# Altium PCB ITEMS PCB Rev A.PcbDoc (part 1 of 2)
Units mm, origin at the board's own origin, x right, y up, seen from the top; angles counter-clockwise.
Board outline 90 x 90 mm, 4 copper layers (Top Layer 1, Inner 1, Ground, Bottom Layer 1), stack 0.567 mm thick; 78 components, 58 nets, 244 pads, 50 vias.
Unrouted connection lines stored in the file: 137.
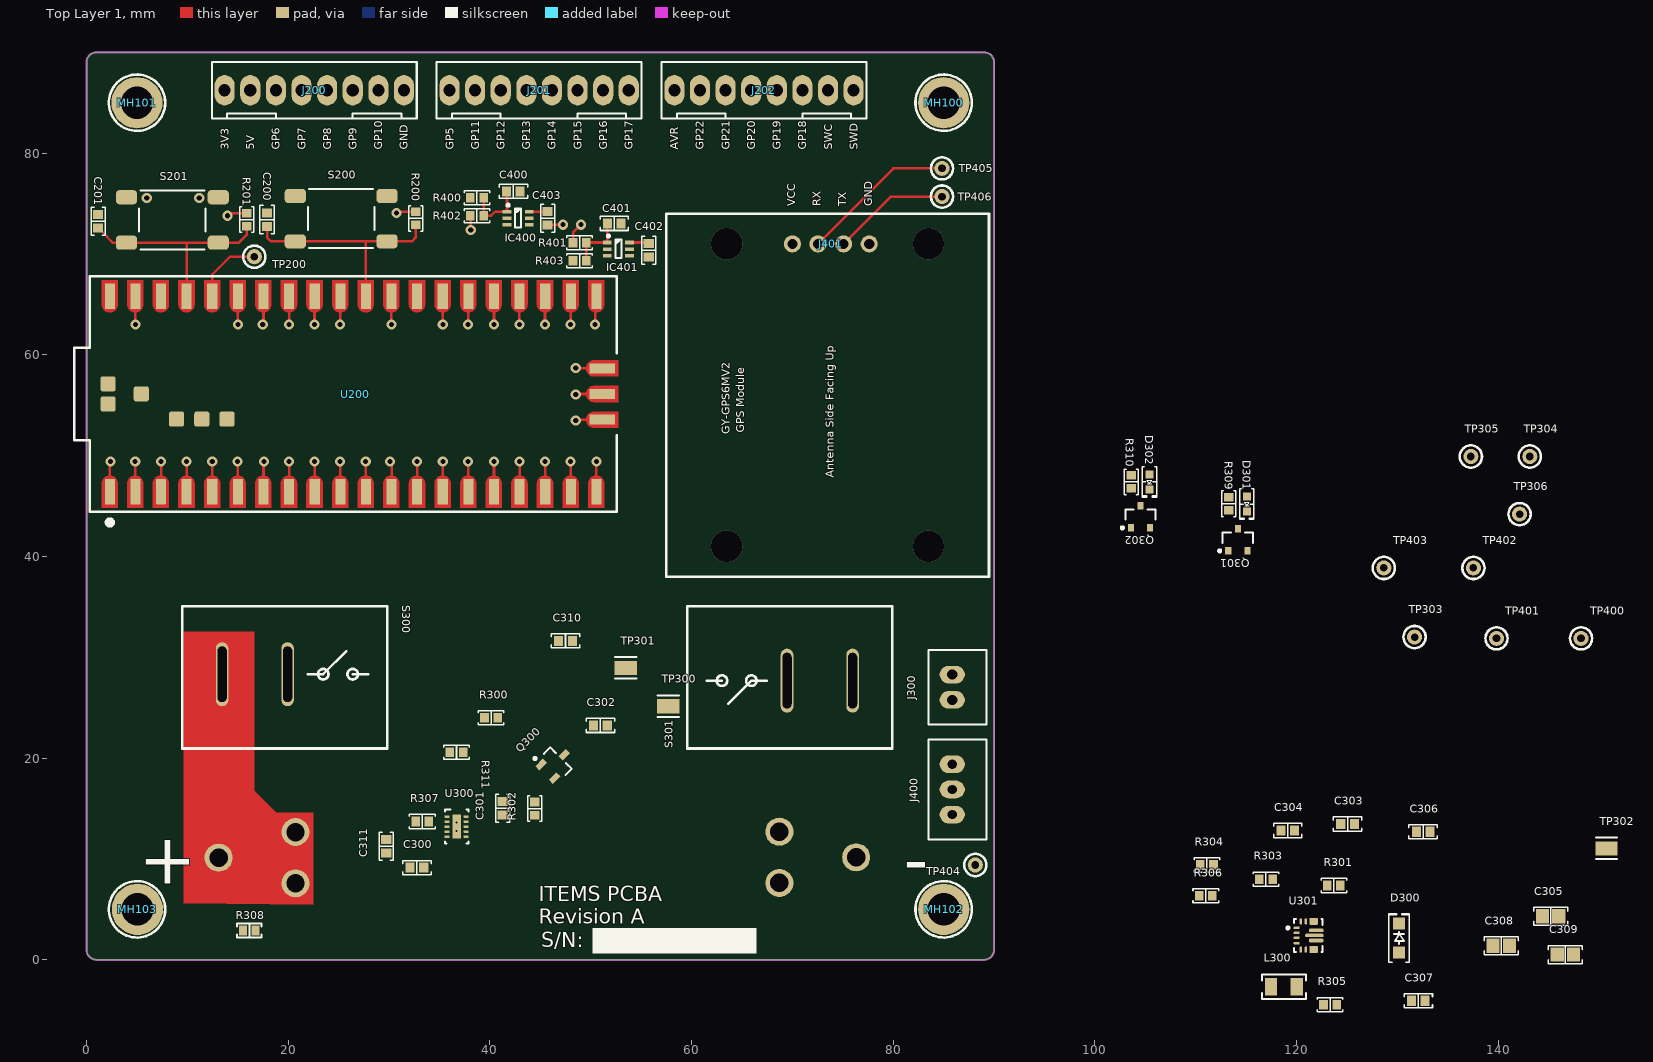
[diagram p0: Top Layer 1 view]
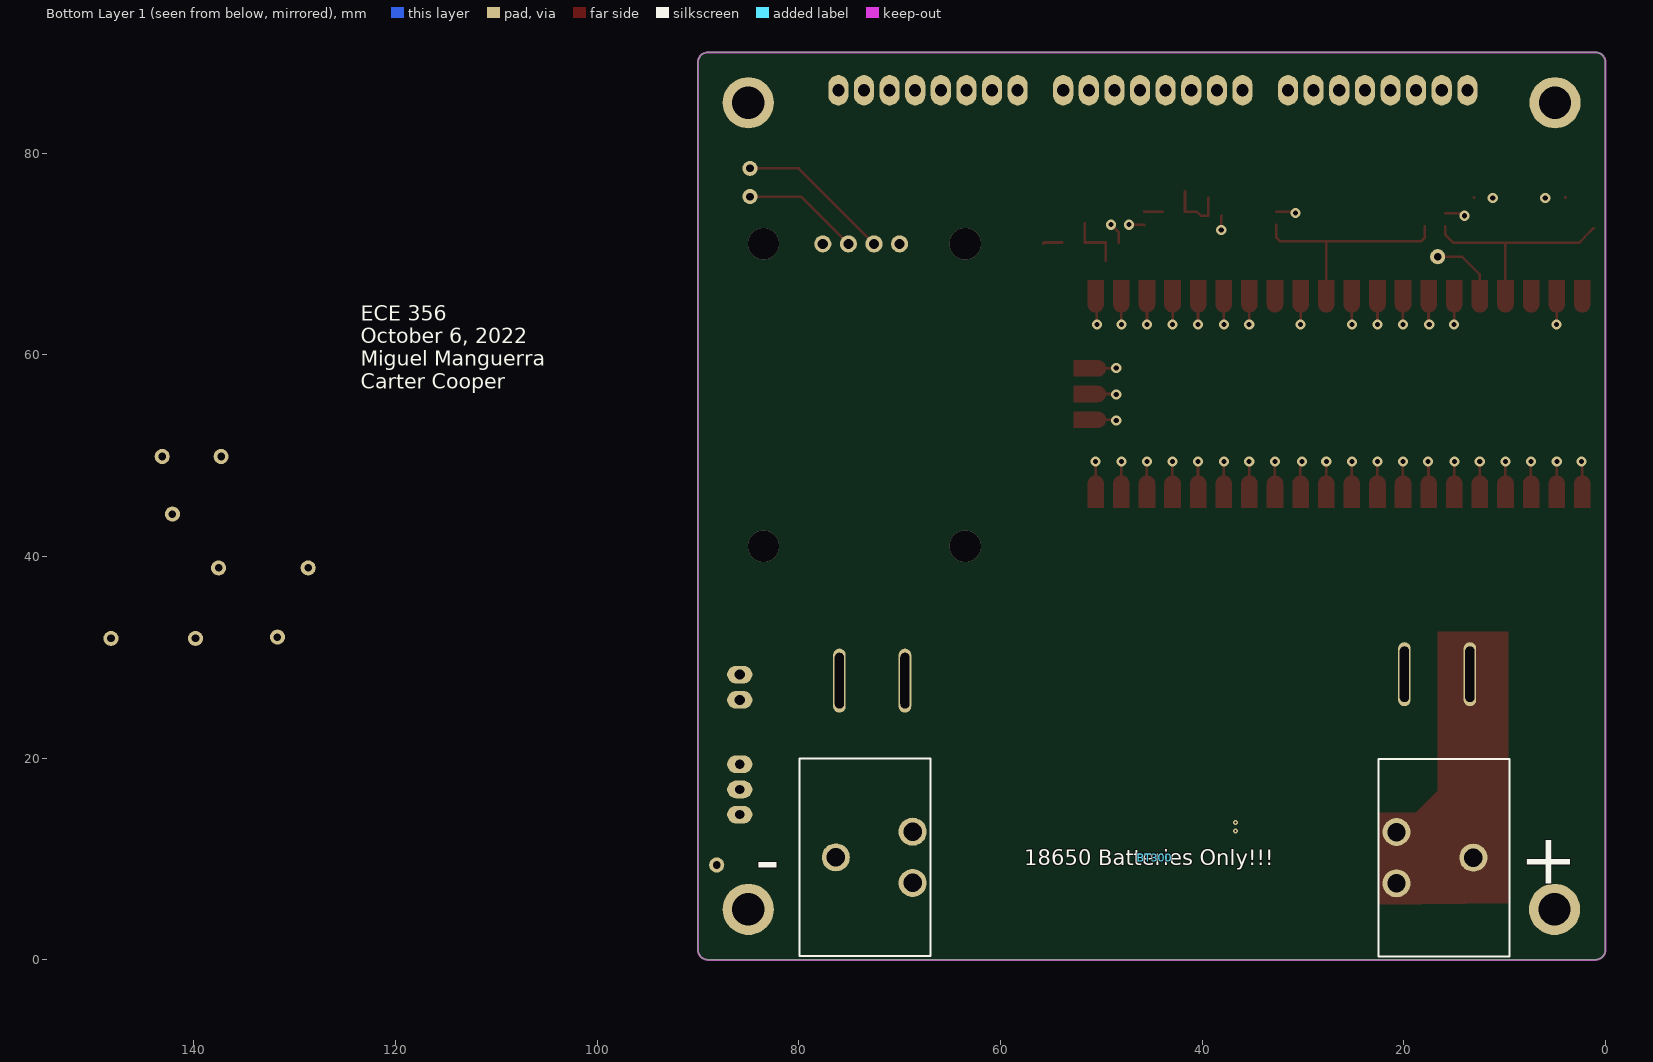
[diagram p1: Bottom Layer 1 view, seen from below]
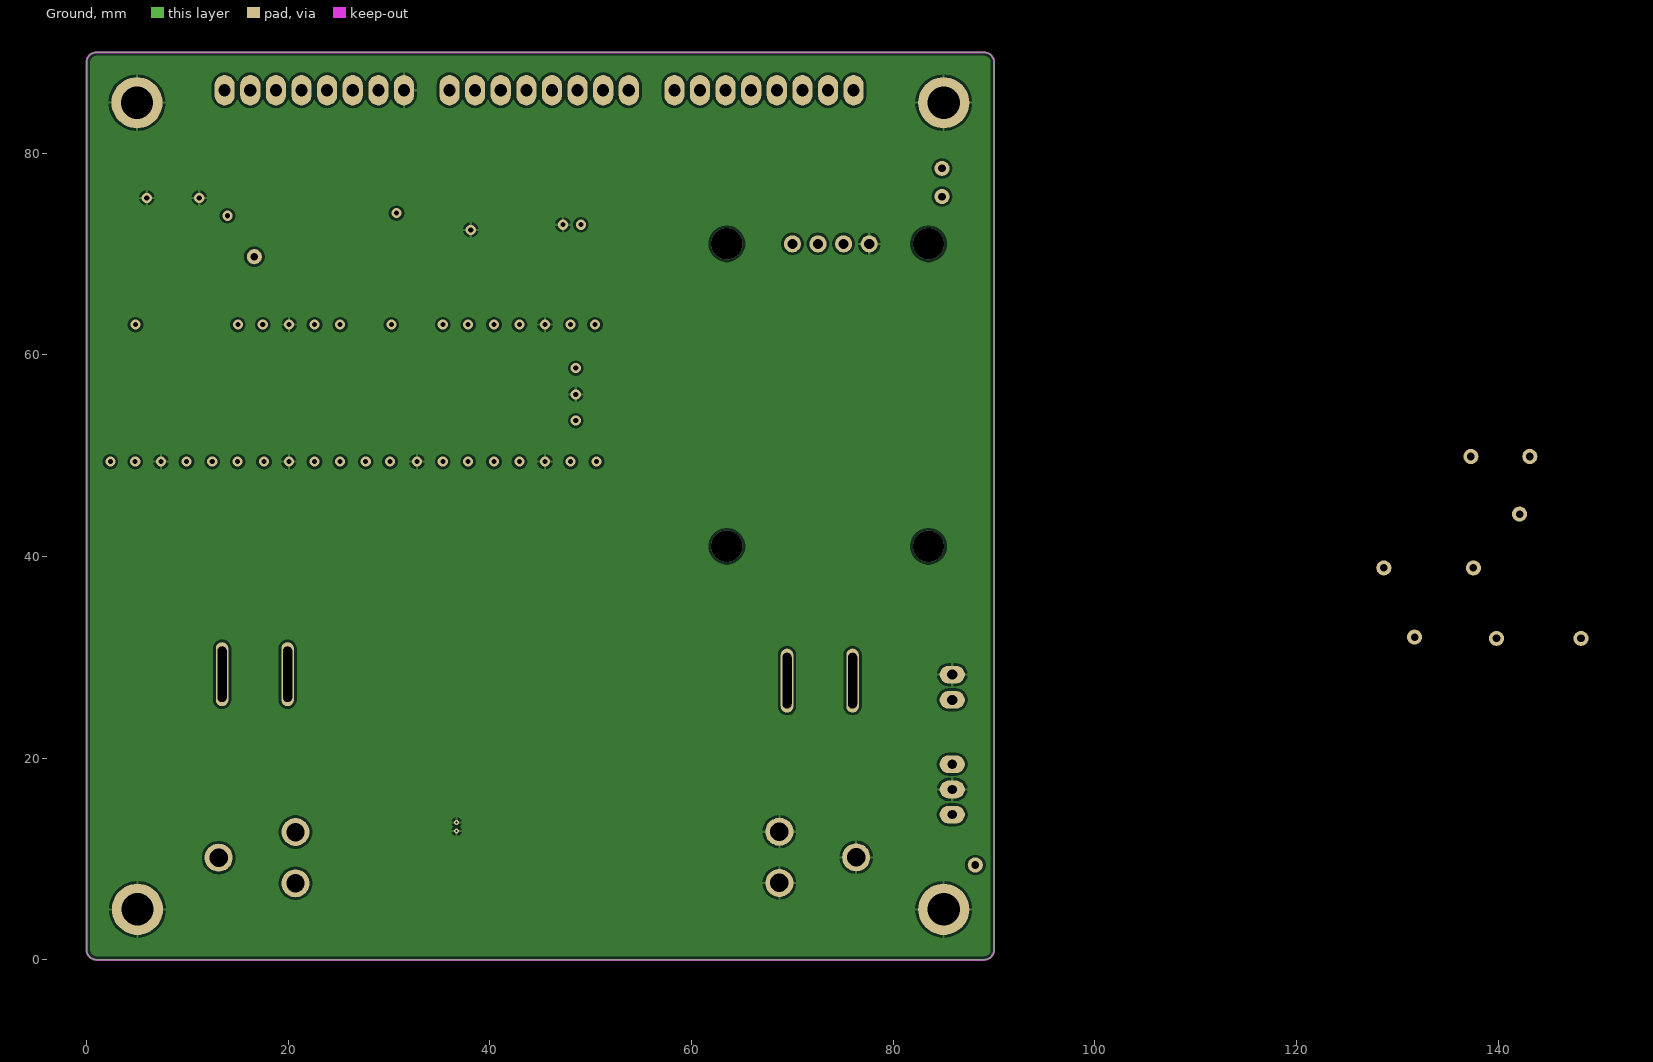
[diagram p2: Ground]

## Layer stack, top to bottom
Top Solder: solder mask 0.0102, Solder Resist, Dk 3.5
Top Layer 1: signal copper 0.035
Dielectric 2: prepreg 0.0711, PP-006, Dk 4.1
Inner 1: signal copper 0.0175
Dielectric 1: dielectric 0.32, FR-4, Dk 4.8
Ground: signal copper 0.0175
Dielectric 3: prepreg 0.0711, PP-006, Dk 4.1
Bottom Layer 1: signal copper 0.035
Bottom Solder: solder mask 0.0102, Solder Resist, Dk 3.5

## Board outline
0,1 0,89 cw(c1,89) 1,90 89,90 cw(c89,89) 90,89 90,1 cw(c89,1) 89,0 1,0 cw(c1,1)

## Design rules (kind name [scope] priority, off if disabled: settings)
Clearance [All] p1: gap=0.254 ignorepadtopadclearanceinfootprint=TRUE except(0: Arc-Hole Track-Hole SMDPad-Hole THPad-Hole Via-Hole Fill-Hole Poly-Hole Region-Hole Text-Hole)
PolygonConnect [All] p1: thpad.connectstyle=Relief thpad.reliefconductorwidth=0.254 thpad.reliefentries=4 thpad.polygonreliefangle="90 Angle" thpad.airgapwidth=0.254 smdpad.connectstyle=Direct smdpad.reliefconductorwidth=0.254 smdpad.reliefentries=4 smdpad.polygonreliefangle="90 Angle" smdpad.airgapwidth=0.254 via.connectstyle=Direct via.reliefconductorwidth=0.254 via.reliefentries=4 via.polygonreliefangle="90 Angle" via.airgapwidth=0.254
RoutingVias [All] p1: holewidth=0.5 width=1 viastyle="Through Hole" minholewidth=0.25 minwidth=0.5 maxholewidth=0.75 maxwidth=1.5
SolderMaskExpansion [All] p1: expansion=0.102 istentingtop=FALSE
Width [All] p1: maxlimit=0.254 minlimit=0.254 preferedwidth=0.254
30 further rules are at their usual default settings.

## Classes and differential pairs
component class Master: MH100 MH101 MH102 MH103
component class Designator: BT300 C300 C301 C302 C303 C304 C305 C306 C307 C308 C309 C310 C311 D300 D301 D302 J300 L300 Q300 Q301 Q302 R300 R301 R302 R303 R304 R305 R306 R307 R308 R309 R310 R311 S300 S301 TP300 TP301 TP302 TP303 TP304 TP305 TP306 U300 U301

## Components (designator, comment, footprint, x,y, rotation, side; value= is the part's Value field where it differs from the comment)
BT300 "54" FP-54-MFG 16,10.126 r270 bottom
C200 "0.1 µF" "CAP 0603_1608" 17.899,73.406 r270 top
C201 "0.1 µF" "CAP 0603_1608" 1.143,73.239 r270 top
C300 "0.1 µF" "CAP 0603_1608" 32.766,9.144 r0 top
C301 "0.1 µF" "CAP 0603_1608" 41.275,15.026 r90 top
C302 "10 µF" "CAP 0603_1608" 50.967,23.241 r0 top
C303 "10 µF" "CAP 0603_1608" 125.055,13.462 r0 top
C304 "10 µF" "CAP 0603_1608" 119.126,12.827 r0 top
C305 "22 µF" "CAP 0805_2012" 145.199,4.318 r0 top
C306 "0.1 µF" "CAP 0603_1608" 132.548,12.7 r0 top
C307 "10 µF" "CAP 0603_1608" 132.08,-4.064 r0 top
C308 "22 µF" "CAP 0805_2012" 140.297,1.397 r0 top
C309 "22 µF" "CAP 0805_2012" 146.647,0.508 r0 top
C310 "0.1 µF" "CAP 0603_1608" 47.498,31.623 r0 top
C311 "0.1 µF" "CAP 0603_1608" 29.718,11.263 r90 top
C400 "0.022 µF" "CAP 0603_1608" 42.331,76.2 r180 top
C401 "0.022 µF" "CAP 0603_1608" 52.324,73.025 r180 top
C402 "0.1 µF" "CAP 0603_1608" 55.753,70.358 r90 top
C403 "0.1 µF" "CAP 0603_1608" 45.72,73.533 r90 top
D300 "RBR2MM40CTFTR" SOD123F 130.175,2.159 r90 top
D301 "Green" "LED 0603_1608 GREEN" 115.062,45.2 r270 top
D302 "Green" "LED 0603_1608 GREEN" 105.41,47.395 r270 top
IC400 "LMV601MGX/NOPB" "TI SC70-6 DCK" 42.799,73.533 r0 top
IC401 "LMV601MGX/NOPB" "TI SC70-6 DCK" 52.748,70.485 r0 top
J200 "0022272081" "MOLEX KK 0022272081" 22.586,86.233 r0 top
J201 "0022272081" "MOLEX KK 0022272081" 44.885,86.233 r0 top
J202 "0022272081" "MOLEX KK 0022272081" 67.183,86.233 r0 top
J300 "B2B-XH-A(LF)(SN)" "JST XH B2B-XH-A" 85.852,27.031 r90 top
J400 "B3B-XH-A(LF)(SN)" "JST XH B3B-XH-A" 85.852,16.891 r90 top
J401 "GY-GPS6MV2" "GY-GPS6MV2 -Footprint-1" 63.5,56 r0 top locked
L300 "1.5µH" "IND 1008_2520" 118.74,-2.667 r0 top
MH100 "Exposed Mounting Hole M3" "Mounting Hole M3-Footprint-1"#1 85,85 r0 top locked
MH101 "Exposed Mounting Hole M3" "Mounting Hole M3-Footprint-1"#1 5,85 r0 top locked
MH102 "Exposed Mounting Hole M3" "Mounting Hole M3-Footprint-1"#1 85,5 r0 top locked
MH103 "Exposed Mounting Hole M3" "Mounting Hole M3-Footprint-1"#2 5,5 r0 top locked
Q300 "BSS314PE" INF-PG-SOT23_N 46.558,19.507 r45 top
Q301 "BSS126" INF-PG-SOT23_L 114.173,41.656 r90 top
Q302 "BSS126" INF-PG-SOT23_L 104.521,43.942 r90 top
R200 "10 kOhms" "RES 0603_1608" 32.639,73.533 r90 top
R201 "10 kOhms" "RES 0603_1608" 15.875,73.406 r90 top
R300 "0 Ohms" "RES 0603_1608" 40.117,24.003 r0 top
R301 "0 Ohms" "RES 0603_1608" 123.698,7.366 r0 top
R302 "10 kOhms" "RES 0603_1608" 44.45,15.001 r90 top
R303 "10 kOhms" "RES 0603_1608" 116.967,8.001 r0 top
R304 "300 kOhms" "RES 0603_1608" 111.11,9.398 r0 top
R305 "10 kOhms" "RES 0603_1608" 123.317,-4.445 r0 top
R306 "51 kOhms" "RES 0603_1608" 110.998,6.35 r0 top
R307 "3.3 kOhms" "RES 0603_1608" 33.289,13.716 r0 top
R308 "47k" "NTC 0603_1608" 16.139,2.921 r0 top
R309 "1 kOhms" "RES 0603_1608" 113.258,45.227 r270 top
R310 "1 kOhms" "RES 0603_1608" 103.606,47.395 r270 top
R311 "0 Ohms" "RES 0603_1608" 36.688,20.574 r0 top
R400 "10 kOhms" "RES 0603_1608" 38.72,75.565 r180 top
R401 "17.4 kOhms" "RES 0603_1608" 48.895,71.12 r180 top
R402 "33 kOhms" "RES 0603_1608" 38.72,73.787 r0 top
R403 "33 kOhms" "RES 0603_1608" 48.895,69.342 r0 top
S200 "1977223-9" "TE FSM4JSMA" 25.251,73.497 r90 top
S201 "1977223-9" "TE FSM4JSMA" 8.509,73.37 r90 top
S300 "Rocker Switch" "Rocker Switch-Footprint-1" 13.439,28.321 r0 top
S301 "Rocker Switch" "Rocker Switch-Footprint-1" 75.969,27.686 r180 top
TP200 "1.5mm Test Point" "1mm Test Point-Footprint-1" 16.637,69.723 r0 top
TP300 "S2751-46R" FP-S2751-46R-MFG 57.692,25.146 r0 top
TP301 "S2751-46R" FP-S2751-46R-MFG 53.467,28.956 r0 top
TP302 "S2751-46R" FP-S2751-46R-MFG 150.749,11.049 r0 top
TP303 "1.5mm Test Point" "1mm Test Point-Footprint-1" 131.699,32.004 r0 top
TP304 "1.5mm Test Point" "1mm Test Point-Footprint-1" 143.129,49.911 r0 top
TP305 "1.5mm Test Point" "1mm Test Point-Footprint-1" 137.287,49.911 r0 top
TP306 "1.5mm Test Point" "1mm Test Point-Footprint-1" 142.113,44.196 r0 top
TP400 "1.5mm Test Point" "1mm Test Point-Footprint-1" 148.209,31.877 r90 top
TP401 "1.5mm Test Point" "1mm Test Point-Footprint-1" 139.827,31.877 r90 top
TP402 "1.5mm Test Point" "1mm Test Point-Footprint-1" 137.541,38.862 r90 top
TP403 "1.5mm Test Point" "1mm Test Point-Footprint-1" 128.651,38.862 r90 top
TP404 "1.5mm Test Point" "1mm Test Point-Footprint-1" 88.138,9.402 r90 top
TP405 "1.5mm Test Point" "1mm Test Point-Footprint-1" 84.836,78.486 r90 top
TP406 "1.5mm Test Point" "1mm Test Point-Footprint-1" 84.836,75.692 r90 top
U200 "SC0918" "New footprint 1" 26.722,56.108 r90 top
U300 "BQ25050DQCR" DQC0010A 36.703,13.208 r0 top
U301 "TPS63070RNMR" FP-RNM0015A-MFG 121.158,2.413 r0 top

## Footprints (in the part's own frame and the unit in brackets; to place one, negate y for a bottom-side part, rotate by r counter-clockwise, add the part's x,y. Pads: shape width x height; smd on the part's side, far side on the other; paste and mask are expansions set on the pad)
"1mm Test Point-Footprint-1" [mm]
  round 1.5 hole 0.75: 1(0,0)
  silkscreen extent -1.1,-1.1 1.1,1.1
"CAP 0603_1608" [mm] "Chip Capacitor, 2-Leads, Body 1.60x0.80mm, IPC Medium Density"
  rect 0.9x1 smd: 1(-0.675,0) 2(0.675,0)
  silkscreen extent -1.4,-0.7 1.4,0.7, body extent -0.8,-0.41 0.8,0.41, height 0.82
"CAP 0805_2012" [mm] "Chip Capacitor, 2-Leads, Body 2.00x1.20mm, IPC Medium Density"
  rect 1.3x1.4 smd: 1(-0.8,0) 2(0.8,0)
  silkscreen extent -1.7,-0.9 1.7,0.9, body extent -1,-0.64 1,0.64, height 1.26
DQC0010A [mm] "SON, 10-Leads, Body 2x3mm, Pitch 0.5mm, Thermal Pad 2.4x0.84mm"
  rrect40% 0.5x0.25 smd: 1(-0.95,1) 2(-0.95,0.5) 3(-0.95,0) 4(-0.95,-0.5) 5(-0.95,-1) 6(0.95,-1) 7(0.95,-0.5) 8(0.95,0) 9(0.95,0.5) 10(0.95,1)
  rrect12% 0.84x2.4 smd paste-0.42 mask+0.102: 11(0,0)
  silkscreen extent -1.18,-1.67 1.18,1.67, body extent -1.05,-1.55 1.05,1.55, height 0.81
FP-54-MFG [mm]
  round 2.78 hole 1.83 paste-1000 mask+0: 1(-2.54,-4.72) 1(0,2.9) 1(2.54,-4.72) 2(-2.574,-52.707) 2(-0.034,-60.327) 2(2.506,-52.707)
  silkscreen extent -9.83,-63.93 9.8,6.5, body extent -9.11,-63.9 9.05,6.48, height 19.16
FP-RNM0015A-MFG [mm]
  rrect40% 0.6x0.25 smd paste+0 mask-1000: 1(-1.15,0.75) 2(-1.15,0.25) 3(-1.15,-0.25) 4(-1.15,-0.75)
  rrect40% 0.25x0.6 smd paste+0 mask-1000: 5(-0.725,-1.4) 6(-0.225,-1.4) 14(-0.225,1.4) 15(-0.725,1.4)
  rrect29% 0.85x0.7 smd paste-1000 mask-1000: 7-8(0.525,-1.4) 12-13(0.525,1.4)
  rrect57% 1.45x0.35 smd paste-1000 mask-1000: 9(0.775,-0.5) 11(0.775,0.5)
  rrect57% 1.8x0.35 smd paste-1000 mask-1000: 10(0.6,0)
  silkscreen extent -2.15,-1.65 1.4,1.65, body extent -1.55,-1.85 1.6,1.85, height 0.25
FP-S2751-46R-MFG [mm]
  rect 2.2x1.4 smd paste+0 mask+0: 1(0,0)
  silkscreen extent -1.05,-1.07 1.05,1.07, body extent -1.2,-0.8 1.2,0.8, height 0.25
"GY-GPS6MV2 -Footprint-1" [mm]
  round 1.7 hole 1: 1(6.5,15) 2(9.04,15) 3(11.58,15) 4(14.12,15)
  silkscreen extent -6,-18 26,18, body extent 4.96,13.84 15.62,16.34, height 5
"IND 1008_2520" [mm] "Chip Inductance, 2-leads, Body 2.5x2.1mm, IPC Medium Density"
  rect 1.2x1.75 smd: 1(-1.275,0) 2(1.275,0)
  silkscreen extent -2.18,-1.22 2.2,1.22, body extent -1.3,-1.05 1.3,1.05, height 1
INF-PG-SOT23_L [mm] "SOT23, 3-Leads, Body 2.9x1.3mm, Pitch 0.95mm, IPC High Density"
  rect 0.75x0.6 smd: 1(-1.1,0.95) 2(-1.1,-0.95) 3(1.1,0)
  silkscreen extent -1.22,-1.5 0.7,1.92, body extent -0.7,-1.5 0.7,1.5, height 1.1
INF-PG-SOT23_N [mm] "SOT23, 3-Leads, Body 2.9x1.3mm, Pitch 0.95mm, IPC Medium Density"
  rect 1.05x0.6 smd: 1(-1.15,0.95) 2(-1.15,-0.95) 3(1.15,0)
  silkscreen extent -1.27,-1.5 0.7,1.92, body extent -0.7,-1.5 0.7,1.5, height 1.1
"JST XH B2B-XH-A" [mm]
  oval 1.75x2.5 hole 1: 1(-1.25,0) 2(1.25,0)
  silkscreen extent -3.7,-3.38 3.7,2.38, body extent -3.7,-3.38 3.7,2.38, height 7
"JST XH B3B-XH-A" [mm]
  oval 1.75x2.5 hole 0.9: 1(-2.5,0) 2(0,0) 3(2.5,0)
  silkscreen extent -4.95,-3.38 4.95,2.38, body extent -4.95,-3.38 4.95,2.38, height 7
"LED 0603_1608 GREEN" [mm] "Chip Diode, 2-Leads, Body 1.60x0.80mm, IPC Medium Density"
  rect 0.8x0.8 smd: 1(-0.75,0) 2(0.75,0)
  silkscreen extent -1.52,-0.7 1.52,0.7, body extent -0.8,-0.4 0.8,0.4, height 0.53
"MOLEX KK 0022272081" [mm]
  oval 2x3 hole 1.2: 1(-8.89,0) 2(-6.35,0) 3(-3.81,0) 4(-1.27,0) 5(1.27,0) 6(3.81,0) 7(6.35,0) 8(8.89,0)
  silkscreen extent -10.16,-2.79 10.16,2.79, body extent -10.16,-2.9 10.16,2.9, height 11.7
"Mounting Hole M3-Footprint-1"#1 [mm]
  round 5.08 hole 3.2: 0(0,0)
  silkscreen extent -2.79,-2.79 2.79,2.79
"Mounting Hole M3-Footprint-1"#2 [mm]
  round 5.08 hole 3.2: 0(0.047,0)
  silkscreen extent -2.79,-2.79 2.79,2.79
"New footprint 1" [mm]
  rect 2.5x1 smd mask+0.102: 1(-9.69,24.415) 2(-9.69,21.875) 4(-9.69,16.795) 5(-9.69,14.255) 6(-9.69,11.715) 7(-9.69,9.175) 8(-9.69,6.635) 9(-9.69,4.095) 10(-9.69,1.555) 11(-9.69,-0.985) 12(-9.69,-3.525) 13(-9.69,-6.065) 14(-9.69,-8.605) 15(-9.69,-11.145) 16(-9.69,-13.685) 17(-9.69,-16.225) 18(-9.69,-18.765) 19(-9.69,-21.305) 20(-9.69,-23.845)
  rrect25% 2.5x1 smd mask+0.102: 3(-9.69,19.335)
  rect 2.5x1 smd: 21(9.69,-23.845) 22(9.69,-21.305) 23(9.69,-18.765) 24(9.69,-16.225) 25(9.69,-13.685) 26(9.69,-11.145) 27(9.69,-8.605) 28(9.69,-6.065) 29(9.69,-3.525) 30(9.69,-0.985) 31(9.69,1.555) 32(9.69,4.095) 33(9.69,6.635) 34(9.69,9.175) 35(9.69,11.715) 36(9.69,14.255) 37(9.69,16.795) 38(9.69,19.335) 39(9.69,21.875) 40(9.69,24.415)
  rect 1x2.5 smd: 41(-2.54,-24.415) 42(0,-24.415) 43(2.54,-24.415)
  rrect30% 1.5x1.5 smd: 44(0.01,21.292) 45(1.01,24.592) 46(-0.99,24.592) 47(-2.49,17.792) 48(-2.49,15.292) 49(-2.49,12.792)
  Top Layer 1 region: -1.74,-25.999 -3.34,-25.999 -3.34,-23.599 -3.34,-23.599 -3.261,-23.252 -3.039,-22.974 -2.718,-22.819 -2.362,-22.819 -2.041,-22.974 -1.819,-23.252 -1.74,-23.599 -1.74,-23.599
  Top Layer 1 region: 0.8,-25.999 -0.8,-25.999 -0.8,-23.599 -0.8,-23.599 -0.721,-23.252 -0.499,-22.974 -0.178,-22.819 0.178,-22.819 0.499,-22.974 0.721,-23.252 0.8,-23.599 0.8,-23.599
  Top Layer 1 region: 3.34,-25.999 1.74,-25.999 1.74,-23.599 1.74,-23.599 1.819,-23.252 2.041,-22.974 2.362,-22.819 2.718,-22.819 3.039,-22.974 3.261,-23.252 3.34,-23.599 3.34,-23.599
  Top Layer 1 region: -11.292,-24.629 -11.292,-23.029 -8.892,-23.029 -8.892,-23.029 -8.545,-23.108 -8.267,-23.33 -8.112,-23.651 -8.112,-24.007 -8.267,-24.328 -8.545,-24.55 -8.892,-24.629 -8.892,-24.629
  Top Layer 1 region: -11.292,-22.089 -11.292,-20.489 -8.892,-20.489 -8.892,-20.489 -8.545,-20.568 -8.267,-20.79 -8.112,-21.111 -8.112,-21.467 -8.267,-21.788 -8.545,-22.01 -8.892,-22.089 -8.892,-22.089
  Top Layer 1 region: -11.292,-19.549 -11.292,-17.949 -8.892,-17.949 -8.892,-17.949 -8.545,-18.028 -8.267,-18.25 -8.112,-18.571 -8.112,-18.927 -8.267,-19.248 -8.545,-19.47 -8.892,-19.549 -8.892,-19.549
  Top Layer 1 region: -11.292,-17.009 -11.292,-15.409 -8.892,-15.409 -8.892,-15.409 -8.545,-15.488 -8.267,-15.71 -8.112,-16.031 -8.112,-16.387 -8.267,-16.708 -8.545,-16.93 -8.892,-17.009 -8.892,-17.009
  Top Layer 1 region: -11.292,-14.469 -11.292,-12.869 -8.892,-12.869 -8.892,-12.869 -8.545,-12.948 -8.267,-13.17 -8.112,-13.491 -8.112,-13.847 -8.267,-14.168 -8.545,-14.39 -8.892,-14.469 -8.892,-14.469
  Top Layer 1 region: -11.292,-11.929 -11.292,-10.329 -8.892,-10.329 -8.892,-10.329 -8.545,-10.408 -8.267,-10.63 -8.112,-10.951 -8.112,-11.307 -8.267,-11.628 -8.545,-11.85 -8.892,-11.929 -8.892,-11.929
  Top Layer 1 region: -11.292,-9.389 -11.292,-7.789 -8.892,-7.789 -8.892,-7.789 -8.545,-7.868 -8.267,-8.09 -8.112,-8.411 -8.112,-8.767 -8.267,-9.088 -8.545,-9.31 -8.892,-9.389 -8.892,-9.389
  Top Layer 1 region: -11.292,-6.849 -11.292,-5.249 -8.892,-5.249 -8.892,-5.249 -8.545,-5.328 -8.267,-5.55 -8.112,-5.871 -8.112,-6.227 -8.267,-6.548 -8.545,-6.77 -8.892,-6.849 -8.892,-6.849
  Top Layer 1 region: -11.292,-4.309 -11.292,-2.709 -8.892,-2.709 -8.892,-2.709 -8.545,-2.788 -8.267,-3.01 -8.112,-3.331 -8.112,-3.687 -8.267,-4.008 -8.545,-4.23 -8.892,-4.309 -8.892,-4.309
  Top Layer 1 region: -11.292,-1.769 -11.292,-0.169 -8.892,-0.169 -8.892,-0.169 -8.545,-0.248 -8.267,-0.47 -8.112,-0.791 -8.112,-1.147 -8.267,-1.468 -8.545,-1.69 -8.892,-1.769 -8.892,-1.769
  Top Layer 1 region: -11.292,0.771 -11.292,2.371 -8.892,2.371 -8.892,2.371 -8.545,2.292 -8.267,2.07 -8.112,1.749 -8.112,1.393 -8.267,1.072 -8.545,0.85 -8.892,0.771 -8.892,0.771
  Top Layer 1 region: -11.292,3.311 -11.292,4.911 -8.892,4.911 -8.892,4.911 -8.545,4.832 -8.267,4.61 -8.112,4.289 -8.112,3.933 -8.267,3.612 -8.545,3.39 -8.892,3.311 -8.892,3.311
  Top Layer 1 region: -11.292,5.851 -11.292,7.451 -8.892,7.451 -8.892,7.451 -8.545,7.372 -8.267,7.15 -8.112,6.829 -8.112,6.473 -8.267,6.152 -8.545,5.93 -8.892,5.851 -8.892,5.851
  Top Layer 1 region: -11.292,8.391 -11.292,9.991 -8.892,9.991 -8.892,9.991 -8.545,9.912 -8.267,9.69 -8.112,9.369 -8.112,9.013 -8.267,8.692 -8.545,8.47 -8.892,8.391 -8.892,8.391
  Top Layer 1 region: -11.292,10.931 -11.292,12.531 -8.892,12.531 -8.892,12.531 -8.545,12.452 -8.267,12.23 -8.112,11.909 -8.112,11.553 -8.267,11.232 -8.545,11.01 -8.892,10.931 -8.892,10.931
  Top Layer 1 region: -11.292,13.471 -11.292,15.071 -8.892,15.071 -8.892,15.071 -8.545,14.992 -8.267,14.77 -8.112,14.449 -8.112,14.093 -8.267,13.772 -8.545,13.55 -8.892,13.471 -8.892,13.471
  Top Layer 1 region: -11.292,16.011 -11.292,17.611 -8.892,17.611 -8.892,17.611 -8.545,17.532 -8.267,17.31 -8.112,16.989 -8.112,16.633 -8.267,16.312 -8.545,16.09 -8.892,16.011 -8.892,16.011
  Top Layer 1 region: -11.292,18.551 -11.292,20.151 -8.892,20.151 -8.892,20.151 -8.545,20.072 -8.267,19.85 -8.112,19.529 -8.112,19.173 -8.267,18.852 -8.545,18.63 -8.892,18.551 -8.892,18.551
  Top Layer 1 region: -11.292,21.091 -11.292,22.691 -8.892,22.691 -8.892,22.691 -8.545,22.612 -8.267,22.39 -8.112,22.069 -8.112,21.713 -8.267,21.392 -8.545,21.17 -8.892,21.091 -8.892,21.091
  Top Layer 1 region: -11.292,23.631 -11.292,25.231 -8.892,25.231 -8.892,25.231 -8.545,25.152 -8.267,24.93 -8.112,24.609 -8.112,24.253 -8.267,23.932 -8.545,23.71 -8.892,23.631 -8.892,23.631
  Top Layer 1 region: 11.292,23.631 11.292,25.231 8.892,25.231 8.892,25.231 8.545,25.152 8.267,24.93 8.112,24.609 8.112,24.253 8.267,23.932 8.545,23.71 8.892,23.631 8.892,23.631
  Top Layer 1 region: 11.292,21.091 11.292,22.691 8.892,22.691 8.892,22.691 8.545,22.612 8.267,22.39 8.112,22.069 8.112,21.713 8.267,21.392 8.545,21.17 8.892,21.091 8.892,21.091
  Top Layer 1 region: 11.292,18.551 11.292,20.151 8.892,20.151 8.892,20.151 8.545,20.072 8.267,19.85 8.112,19.529 8.112,19.173 8.267,18.852 8.545,18.63 8.892,18.551 8.892,18.551
  Top Layer 1 region: 11.292,16.011 11.292,17.611 8.892,17.611 8.892,17.611 8.545,17.532 8.267,17.31 8.112,16.989 8.112,16.633 8.267,16.312 8.545,16.09 8.892,16.011 8.892,16.011
  Top Layer 1 region: 11.292,13.471 11.292,15.071 8.892,15.071 8.892,15.071 8.545,14.992 8.267,14.77 8.112,14.449 8.112,14.093 8.267,13.772 8.545,13.55 8.892,13.471 8.892,13.471
  Top Layer 1 region: 11.292,10.931 11.292,12.531 8.892,12.531 8.892,12.531 8.545,12.452 8.267,12.23 8.112,11.909 8.112,11.553 8.267,11.232 8.545,11.01 8.892,10.931 8.892,10.931
  Top Layer 1 region: 11.292,8.391 11.292,9.991 8.892,9.991 8.892,9.991 8.545,9.912 8.267,9.69 8.112,9.369 8.112,9.013 8.267,8.692 8.545,8.47 8.892,8.391 8.892,8.391
  Top Layer 1 region: 11.292,5.851 11.292,7.451 8.892,7.451 8.892,7.451 8.545,7.372 8.267,7.15 8.112,6.829 8.112,6.473 8.267,6.152 8.545,5.93 8.892,5.851 8.892,5.851
  Top Layer 1 region: 11.292,3.311 11.292,4.911 8.892,4.911 8.892,4.911 8.545,4.832 8.267,4.61 8.112,4.289 8.112,3.933 8.267,3.612 8.545,3.39 8.892,3.311 8.892,3.311
  Top Layer 1 region: 11.292,0.771 11.292,2.371 8.892,2.371 8.892,2.371 8.545,2.292 8.267,2.07 8.112,1.749 8.112,1.393 8.267,1.072 8.545,0.85 8.892,0.771 8.892,0.771
  Top Layer 1 region: 11.292,-1.769 11.292,-0.169 8.892,-0.169 8.892,-0.169 8.545,-0.248 8.267,-0.47 8.112,-0.791 8.112,-1.147 8.267,-1.468 8.545,-1.69 8.892,-1.769 8.892,-1.769
  Top Layer 1 region: 11.292,-4.309 11.292,-2.709 8.892,-2.709 8.892,-2.709 8.545,-2.788 8.267,-3.01 8.112,-3.331 8.112,-3.687 8.267,-4.008 8.545,-4.23 8.892,-4.309 8.892,-4.309
  Top Layer 1 region: 11.292,-6.849 11.292,-5.249 8.892,-5.249 8.892,-5.249 8.545,-5.328 8.267,-5.55 8.112,-5.871 8.112,-6.227 8.267,-6.548 8.545,-6.77 8.892,-6.849 8.892,-6.849
  Top Layer 1 region: 11.292,-9.389 11.292,-7.789 8.892,-7.789 8.892,-7.789 8.545,-7.868 8.267,-8.09 8.112,-8.411 8.112,-8.767 8.267,-9.088 8.545,-9.31 8.892,-9.389 8.892,-9.389
  Top Layer 1 region: 11.292,-11.929 11.292,-10.329 8.892,-10.329 8.892,-10.329 8.545,-10.408 8.267,-10.63 8.112,-10.951 8.112,-11.307 8.267,-11.628 8.545,-11.85 8.892,-11.929 8.892,-11.929
  Top Layer 1 region: 11.292,-14.469 11.292,-12.869 8.892,-12.869 8.892,-12.869 8.545,-12.948 8.267,-13.17 8.112,-13.491 8.112,-13.847 8.267,-14.168 8.545,-14.39 8.892,-14.469 8.892,-14.469
  Top Layer 1 region: 11.292,-17.009 11.292,-15.409 8.892,-15.409 8.892,-15.409 8.545,-15.488 8.267,-15.71 8.112,-16.031 8.112,-16.387 8.267,-16.708 8.545,-16.93 8.892,-17.009 8.892,-17.009
  Top Layer 1 region: 11.292,-19.549 11.292,-17.949 8.892,-17.949 8.892,-17.949 8.545,-18.028 8.267,-18.25 8.112,-18.571 8.112,-18.927 8.267,-19.248 8.545,-19.47 8.892,-19.549 8.892,-19.549
  Top Layer 1 region: 11.292,-22.089 11.292,-20.489 8.892,-20.489 8.892,-20.489 8.545,-20.568 8.267,-20.79 8.112,-21.111 8.112,-21.467 8.267,-21.788 8.545,-22.01 8.892,-22.089 8.892,-22.089
  Top Layer 1 region: 11.292,-24.629 11.292,-23.029 8.892,-23.029 8.892,-23.029 8.545,-23.108 8.267,-23.33 8.112,-23.651 8.112,-24.007 8.267,-24.328 8.545,-24.55 8.892,-24.629 8.892,-24.629
  silkscreen extent -12.99,-25.88 11.68,27.94, body extent -10.49,-25.21 10.51,27.22, height 3.69
"NTC 0603_1608" [mm] "NTC Thermistor, 2-Leads, Body 1.60x0.80mm, IPC Medium Density"
  rect 0.8x1 smd: 1(-0.625,0) 2(0.625,0)
  silkscreen extent -1.2,-0.7 1.2,0.7, body extent -0.8,-0.41 0.8,0.41, height 0.82
"RES 0603_1608" [mm] "Chip Resistor, 2-Leads, Body 1.60x0.80mm, IPC Medium Density"
  rect 0.85x0.95 smd: 1(-0.65,0) 2(0.65,0)
  silkscreen extent -1.27,-0.7 1.27,0.7, body extent -0.8,-0.4 0.8,0.4, height 0.45
"Rocker Switch-Footprint-1" [mm]
  oval 1.25x6.35 hole 0.889 slot 5.5 at 90 deg: 1(0,0) 2(6.5,0)
  silkscreen extent -3.94,-7.37 16.38,6.73, body extent -4.28,-7.75 16.72,7.05, height 17.31
SOD123F [mm] "SODFL, 2-Leads, Body 1.60x3.50mm, IPC Medium Density"
  rect 1.2x1.2 smd: 1(-1.43,0) 2(1.43,0)
  silkscreen extent -2.41,-1.02 2.41,1.02, body extent -1.75,-0.8 1.75,0.8, height 1.1
"TE FSM4JSMA" [mm]
  rrect50% 1.4x2.1 smd: 1(2.25,4.55) 2(2.25,-4.55) 3(-2.25,4.55) 4(-2.25,-4.55)
  silkscreen extent -2.92,-3.3 2.92,3.3, body extent -3,-5 3,5, height 5.08
"TI SC70-6 DCK" [mm] "SC70, 6-Leads, Body 2.00x2.10mm, Pitch 0.65mm, IPC Medium Density"
  rect 0.85x0.35 smd: 1(-1.1,0.65) 2(-1.1,0) 3(-1.1,-0.65) 4(1.1,-0.65) 5(1.1,0) 6(1.1,0.65)
  silkscreen extent -1.12,-0.9 0.3,1.42, body extent -1.06,-1 1.06,1, height 1.1

## Part data
BT300: library part CMP-00051-1, "Cylindrical Battery Contacts, Clips, Holders & Springs 16-19mm PC BATTERY CLIP", Lead Free="Lead Free"
C200 C201 C402 C403: library part C0603X104M3RAC7867, "CAP CER 0.1UF 25V X7R 0603", Device Package="0603 (1608 Metric)", manufacturer=KEMET, Operating Temperature="-55°C ~ 125°C", Supplier Part Number 1=399-13148-1-ND, Temperature Coefficient=X7R, Tolerance=±20%, Voltage - Rated=25V, Applications="Boardflex Sensitive", Capacitance="0.1 µF", componentlink1description=Datasheet, componentlink1url=https://api.kemet.com/component-edge/download/datasheet/C0603X104M3RACTU.pdf, componentlink2description="DigiKey Link", componentlink2url=https://www.digikey.com/en/products/detail/kemet/C0603X104M3RAC7867/2202613, Features="Soft Termination", lastupdated="2022-03-07 3:18:24 PM", Lifecycle Status=Active, Minimum Order=1, Mounting Type="Surface Mount, MLCC", Package / Case="0603 (1608 Metric)", packaging=TapeAndReel, Part Number=C0603X104M3RAC7867, Part Status=Active, partid=2484, price=0.07, series="SMD Comm X7R Flex", Size / Dimension="0.063\" L x 0.031\" W (1.60mm x 0.80mm)", Supplier 1=DigiKey, Thickness (Max)="0.034\" (0.87mm)"
C300 C301 C306 C310 C311: library part C0603C104K5RAC7411, "CAP CER 0.1UF 50V X7R 0603", Device Package="0603 (1608 Metric)", manufacturer=KEMET, Operating Temperature="-55°C ~ 125°C", Supplier Part Number 1=399-7374-2-ND, Temperature Coefficient=X7R, Tolerance=±10%, Voltage - Rated=50V, Applications="Bypass, Decoupling", Capacitance="0.1 µF", componentlink1description=Datasheet, componentlink1url=https://api.kemet.com/component-edge/download/datasheet/C0603C104K5RAC7411.pdf, componentlink2description="DigiKey Link", componentlink2url=https://www.digikey.com/en/products/detail/kemet/C0603C104K5RAC7411/3317013, lastupdated="2022-09-19 1:01:20 PM", Lifecycle Status=Active, Minimum Order=15000, Mounting Type="Surface Mount, MLCC", Package / Case="0603 (1608 Metric)", packaging=TapeAndReel, Part Number=C0603C104K5RAC7411, Part Status=Active, partid=2233, price=0.01, series="SMD Comm X7R", Size / Dimension="0.063\" L x 0.031\" W (1.60mm x 0.80mm)", Supplier 1=DigiKey, Thickness (Max)="0.035\" (0.90mm)"
C302 C303 C304 C307: library part GRM188R61E106MA73J, "CAP CER 10UF 25V X5R 0603", Device Package="0603 (1608 Metric)", manufacturer="Murata Electronics", Operating Temperature="-55°C ~ 85°C", Supplier Part Number 1=490-12737-1-ND, Temperature Coefficient=X5R, Tolerance=±20%, Voltage - Rated=25V, Applications="General Purpose", Capacitance="10 µF", componentlink1description=Datasheet, componentlink1url=https://search.murata.co.jp/Ceramy/image/img/A01X/G101/ENG/GRM188R61E106MA73-01.pdf, componentlink2description="DigiKey Link", componentlink2url=https://www.digikey.com/en/products/detail/murata-electronics/GRM188R61E106MA73J/4905347, lastupdated="2022-09-19 1:00:57 PM", Lifecycle Status=Active, Minimum Order=1, Mounting Type="Surface Mount, MLCC", Package / Case="0603 (1608 Metric)", packaging=TapeAndReel, Part Number=GRM188R61E106MA73J, Part Status=Active, partid=10710, price=0.05, series=GRM, Size / Dimension="0.063\" L x 0.031\" W (1.60mm x 0.80mm)", Supplier 1=DigiKey, Thickness (Max)="0.039\" (1.00mm)"
C305 C308 C309: library part CL21A226MOQNNNE, "CAP CER 22UF 16V X5R 0805", Device Package="0805 (2012 Metric)", manufacturer="Samsung Electro-Mechanics", Operating Temperature="-55°C ~ 85°C", Supplier Part Number 1=1276-2909-1-ND, Temperature Coefficient=X5R, Tolerance=±20%, Voltage - Rated=16V, Applications="General Purpose", Capacitance="22 µF", componentlink1description=Datasheet, componentlink1url=http://www.samsungsem.com/kr/support/product-search/mlcc/CL21A226MOQNNNE.jsp, componentlink2description="DigiKey Link", componentlink2url=https://www.digikey.com/en/products/detail/samsung-electro-mechanics/CL21A226MOQNNNE/3888567, lastupdated="2022-09-19 1:04:25 PM", Lifecycle Status=Active, Minimum Order=1, Mounting Type="Surface Mount, MLCC", Package / Case="0805 (2012 Metric)", packaging=TapeAndReel, Part Number=CL21A226MOQNNNE, Part Status=Active, partid=3052, price=0.05, series=CL, Size / Dimension="0.079\" L x 0.049\" W (2.00mm x 1.25mm)", Supplier 1=DigiKey, Thickness (Max)="0.055\" (1.40mm)"
C400 C401: library part CC0603KRX7R7BB223, "CAP CER 0.022UF 16V X7R 0603", Device Package="0603 (1608 Metric)", manufacturer=Yageo, Operating Temperature="-55°C ~ 125°C", Supplier Part Number 1=311-1800-1-ND, Temperature Coefficient=X7R, Tolerance=±10%, Voltage - Rated=16V, Applications="General Purpose", Capacitance="0.022 µF", componentlink1description=Datasheet, componentlink1url=https://www.yageo.com/upload/media/product/productsearch/datasheet/mlcc/UPY-GPHC_X7R_6.3V-to-50V_18.pdf, componentlink2description="DigiKey Link", componentlink2url=https://www.digikey.com/en/products/detail/yageo/CC0603KRX7R7BB223/5195208, lastupdated="2022-09-19 1:01:04 PM", Lifecycle Status=Active, Minimum Order=1, Mounting Type="Surface Mount, MLCC", Package / Case="0603 (1608 Metric)", packaging=TapeAndReel, Part Number=CC0603KRX7R7BB223, Part Status=Active, partid=7845, price=0.01, series=CC, Size / Dimension="0.063\" L x 0.031\" W (1.60mm x 0.80mm)", Supplier 1=DigiKey, Thickness (Max)="0.035\" (0.90mm)"
D300: "DIODE (RECTIFIER FRD) 40V-VR 2A-", Current - Average Rectified (Io)=2A, Current - Reverse Leakage @ Vr="100 µA @ 40 V", manufacturer="Rohm Semiconductor", Operating Temperature - Junction="150°C (Max)", Package / Case=SOD-123F, Supplier Device Package=PMDU, Supplier Part Number 1=RBR2MM40CTFCT-ND, Voltage - DC Reverse (Vr) (Max)="40 V", Voltage - Forward (Vf) (Max) @ If="520 mV @ 2 A", componentlink1description=Datasheet, componentlink1url=https://www.rohm.com/datasheet/RBR2MM40CTF/rbr2mm40ctftr-e, componentlink2description="DigiKey Link", componentlink2url=https://www.digikey.com/en/products/detail/rohm-semiconductor/RBR2MM40CTFTR/9748140, Diode Type=Schottky, lastupdated="2022-09-19 1:46:35 PM", Lifecycle Status=Active, Minimum Order=1, Mounting Type="Surface Mount", packaging=TapeAndReel, Part Number=RBR2MM40CTFTR, Part Status=Active, partid=2367, price=0.12, series="Automotive, AEC-Q101", Speed="Fast Recovery =< 500ns, > 200mA (Io)", Supplier 1=DigiKey
D301 D302: library part XZVGT53W-6, "LED GREEN CLEAR 2SMD", Current - Test=20mA, Device Package="0603 (1608 Metric)", Lens Color=Colorless, manufacturer=SunLED, Millicandela Rating=49mcd, Supplier Device Package=2-SMD, Supplier Part Number 1=1497-1243-1-ND, Voltage - Forward (Vf) (Typ)=2.1V, Color=Green, componentlink1description=Datasheet, componentlink1url=https://www.sunledusa.com/products/spec/XZVGT53W-6.pdf, componentlink2description="DigiKey Link", componentlink2url=https://www.digikey.com/en/products/detail/sunled/XZVGT53W-6/4902128, Configuration=Standard, Height (Max)=0.28mm, lastupdated="2022-09-13 7:29:38 AM", Lens Size="1.20mm x 0.80mm", Lens Style="Rectangle with Flat Top", Lens Transparency=Clear, Lifecycle Status=Active, Minimum Order=1, Mounting Type="Surface Mount", Package / Case="0603 (1608 Metric)", packaging=TapeAndReel, Part Number=XZVGT53W-6, Part Status=Active, partid=581, price=0.05, series=-, Size / Dimension="1.60mm L x 0.80mm W", Supplier 1=DigiKey, Viewing Angle=120°, Wavelength - Dominant=570nm, Wavelength - Peak=574nm
IC400 IC401: "IC OPAMP GP 1 CIRCUIT SC70-6", Current - Input Bias=0.02pA, Current - Output / Channel=113mA, Current - Supply=107µA, Device Package="6-TSSOP, SC-88, SOT-363", manufacturer="Texas Instruments", Operating Temperature="-40°C ~ 125°C", Supplier Device Package=SC-70-6, Supplier Part Number 1=296-46438-1-ND, Voltage - Input Offset=250µV, Voltage - Supply, Single/Dual (±)="2.7V ~ 5.5V", Amplifier Type="General Purpose", componentlink1description=Datasheet, componentlink1url=http://www.ti.com/general/docs/suppproductinfo.tsp?distId=10&gotoUrl=http%3A%2F%2Fwww.ti.com%2Flit%2Fgpn%2Flmv601, componentlink2description="DigiKey Link", componentlink2url=http://digikey.com/product-detail/en/texas-instruments/LMV601MGX-NOPB/296-46438-1-ND/7033611, Gain Bandwidth Product=1MHz, lastupdated="2020-01-09 2:17:00 AM", Lifecycle Status=Active, Minimum Order=1, Mounting Type="Surface Mount", Number of Circuits=1, Output Type=Rail-to-Rail, Package / Case="6-TSSOP, SC-88, SOT-363", packaging=ReReel, Part Number=LMV601MGX/NOPB, Part Status=Active, partid=25, price=0.00, series=-, Slew Rate=1V/µs, Supplier 1=DigiKey
J200 J201 J202: "CONN HEADER VERT 8POS 2.54MM", Insulation Color=Natural, manufacturer=Molex, Material Flammability Rating="UL94 V-0", Supplier Part Number 1=WM4117-ND, componentlink1description=Datasheet, componentlink1url=https://www.molex.com/pdm_docs/sd/022272081_sd.pdf, componentlink2description="DigiKey Link", componentlink2url=http://digikey.com/product-detail/en/molex/0022272081/WM4117-ND/1130583, Connector Type=Header, Contact Finish - Mating=Tin, Contact Finish - Post=Tin, Contact Finish Thickness - Mating="100.0µin (2.54µm)", Contact Length - Mating="0.295\" (7.49mm)", Contact Length - Post="0.140\" (3.56mm)", Contact Material=Brass, Contact Shape=Square, Contact Type="Male Pin", Fastening Type="Friction Lock", Insulation Height="0.461\" (11.70mm)", Insulation Material="Polyamide (PA), Nylon", lastupdated="2020-01-12 11:52:41 PM", Lifecycle Status=Active, Minimum Order=1, Mounting Type="Through Hole", Number of Positions=8, Number of Positions Loaded=All, Number of Rows=1, Overall Contact Length="0.560\" (14.22mm)", packaging=Bulk, Part Number=0022272081, Part Status=Active, partid=82, Pitch - Mating="0.100\" (2.54mm)", price=0.60, series="KK 6410", Shrouding="Shrouded - 1 Wall", Style="Board to Cable/Wire", Supplier 1=DigiKey, Termination=Solder
J300: "CONN HEADER VERT 2POS 2.5MM", Current Rating (Amps)=3A, Insulation Color=Natural, manufacturer="JST Sales America Inc.", Material Flammability Rating="UL94 V-0", Operating Temperature="-25°C ~ 85°C", Supplier Part Number 1=455-2247-ND, Voltage Rating=250V, componentlink1description=Datasheet, componentlink1url=http://www.jst-mfg.com/product/pdf/eng/eXH.pdf, componentlink2description="DigiKey Link", componentlink2url=http://digikey.com/product-detail/en/jst-sales-america-inc/B2B-XH-A-LF-SN/455-2247-ND/1651045, Connector Type=Header, Contact Finish - Mating=Tin, Contact Finish - Post=Tin, Contact Length - Post="0.134\" (3.40mm)", Contact Material=Brass, Contact Shape=Square, Contact Type="Male Pin", Fastening Type="Detent Lock", Insulation Height="0.276\" (7.00mm)", Insulation Material="Polyamide (PA66), Nylon 6/6", lastupdated="2020-01-12 11:46:08 PM", Lifecycle Status=Active, Minimum Order=1, Mounting Type="Through Hole", Number of Positions=2, Number of Positions Loaded=All, Number of Rows=1, packaging=Bulk, Part Number=B2B-XH-A(LF)(SN), Part Status=Active, partid=67, Pitch - Mating="0.098\" (2.50mm)", price=0.15, series=XH, Shrouding="Shrouded - 4 Wall", Style="Board to Cable/Wire", Supplier 1=DigiKey, Termination="Press-Fit, Solder"
J400: "CONN HEADER VERT 3POS 2.5MM", Current Rating (Amps)=3A, Insulation Color=Natural, manufacturer="JST Sales America Inc.", Material Flammability Rating="UL94 V-0", Operating Temperature="-25°C ~ 85°C", Supplier Part Number 1=455-2248-ND, Voltage Rating=250V, componentlink1description=Datasheet, componentlink1url=http://www.jst-mfg.com/product/pdf/eng/eXH.pdf, componentlink2description="DigiKey Link", componentlink2url=http://digikey.com/product-detail/en/jst-sales-america-inc/B3B-XH-A-LF-SN/455-2248-ND/1651046, Connector Type=Header, Contact Finish - Mating=Tin, Contact Finish - Post=Tin, Contact Length - Post="0.134\" (3.40mm)", Contact Material=Brass, Contact Shape=Square, Contact Type="Male Pin", Fastening Type="Detent Lock", Insulation Height="0.276\" (7.00mm)", Insulation Material="Polyamide (PA66), Nylon 6/6", lastupdated="2020-01-12 11:46:22 PM", Lifecycle Status=Active, Minimum Order=1, Mounting Type="Through Hole", Number of Positions=3, Number of Positions Loaded=All, Number of Rows=1, packaging=Bulk, Part Number=B3B-XH-A(LF)(SN), Part Status=Active, partid=68, Pitch - Mating="0.098\" (2.50mm)", price=0.19, series=XH, Shrouding="Shrouded - 4 Wall", Style="Board to Cable/Wire", Supplier 1=DigiKey, Termination="Press-Fit, Solder"
J401: library part CMP-00056-1, "NEO-6M GPS Module"
L300: library part CVH252009-1R5M, "FIXED IND 1.5UH 1.5A 70 MOHM SMD", Current Rating (Amps)=1.5A, DC Resistance (DCR)="70mOhm Max", Device Package="1008 (2520 Metric)", Frequency - Self Resonant=50MHz, Inductance Frequency - Test=1MHz, manufacturer="Bourns Inc.", Operating Temperature="-55°C ~ 125°C", Supplier Part Number 1=CVH252009-1R5MCT-ND, Tolerance=±20%, componentlink1description=Datasheet, componentlink1url=https://www.bourns.com/docs/Product-Datasheets/CVH.pdf, componentlink2description="DigiKey Link", componentlink2url=http://digikey.com/product-detail/en/bourns-inc/CVH252009-1R5M/CVH252009-1R5MCT-ND/3440084, Height - Seated (Max)="0.039\" (1.00mm)", Inductance=1.5µH, lastupdated="2020-09-02 1:28:58 AM", Lifecycle Status=Active, Material - Core=Ferrite, Minimum Order=1, Mounting Type="Surface Mount", Package / Case="1008 (2520 Metric)", packaging=TapeAndReel, Part Number=CVH252009-1R5M, Part Status=Active, partid=3416, price=0.10, series=CVH252009, Shielding=Shielded, Size / Dimension="0.098\" L x 0.079\" W (2.50mm x 2.00mm)", Supplier 1=DigiKey, Supplier Device Package="1008 (2520 Metric)", Type=Multilayer
MH100 MH101 MH102 MH103: library part CMP-00028-00002-1, "M3 Mounting Hole Exposed"
Q300: library part CMP-1099-00027-1, "P-Channel OptiMOS P3 Small-Signal-Transistor, -30 V VDS, -1.5 A ID, -55 to 150 degC, PG-SOT23, Reel, Green", manufacturer=Infineon, componentlink1description="Manufacturer URL", componentlink1url=http://www.infineon.com/, componentlink2description=Datasheet, componentlink2url=http://www.infineon.com/dgdl/BSS314PE_rev2.3.pdf?folderId=db3a304314dca38901154a72e3951a65&fileId=db3a304330f68606013109b696aa0084, ComponentLink3Description="Package Specification", ComponentLink3URL=http://www.infineon.com/dgdl/SOT23-Package_Overview.pdf?folderId=db3a30431936bc4b0119532290053c66&fileId=db3a30431936bc4b0119533468123c85, DatasheetVersion="Rev. 2.3", Green=TRUE, Halogen-free=TRUE, ID (max)="-1.5Â A", IDpuls (max)="-6.1Â A", Mounting Technology="Surface Mount", PackageDescription="3-Pin Small Outline Transistor Package, 2.9 x 1.3 mm Body, 0.95 mm Pitch", PackageReference=PG-SOT23, PackageVersion=Apr-08, Packing=Reel, PartNumber=BSS314PE, Pto t (max)="0.5Â W", QG="-2.9Â nC", RDS (on) (max)="140Â mOhm", RDS (on) (max) (@4.5V)="230Â mOhm", Rth="250Â K/W", VDS (max)="-30Â V", VGS(th) (max)="-2Â V", VGS(th) (min)="-1Â V"
Q301 Q302: library part CMP-1153-00007-1, "N-Channel SIPMOS Small-Signal-Transistor, 600 V VDS, 0.021 A ID, -55 to 150 degC, PG-SOT23, Reel, Green", manufacturer=Infineon, componentlink1description="Manufacturer URL", componentlink1url=http://www.infineon.com/, componentlink2description=Datasheet, componentlink2url=http://www.infineon.com/dgdl/BSS126_Rev2.1.pdf?folderId=db3a3043156fd573011622e10b5c1f67&fileId=db3a304330f6860601310483af163eba, ComponentLink3Description="Package Specification", ComponentLink3URL=http://www.infineon.com/dgdl/SOT23-Package_Overview.pdf?folderId=db3a30431936bc4b0119532290053c66&fileId=db3a30431936bc4b0119533468123c85, DatasheetVersion="Rev. 2.1", Green=TRUE, Halogen-free=TRUE, ID(max)="0.021Â A", IDpuls(max)="0.085Â A", Mode=Depletion, Mounting Technology="Surface Mount", PackageDescription="3-Pin Small Outline Transistor Package, 2.9 x 1.3 mm Body, 0.95 mm Pitch", PackageReference=PG-SOT23, PackageVersion=Apr-08, Packing=Reel, PartNumber=BSS126, Ptot(max)="0.5 W", QG="1.4Â nC", RDS (on)(max)="700 mOhm", RthJC(max)="350 K/W", Technology=SIPMOS, VDS (max)="600 V", VGS(th)(max)="-1.6Â V", VGS(th)(min)="-2.7Â V"
R200 R201 R302 R303 R305 R400: library part RT0603FRE0710KL, "RES SMD 10K OHM 1% 1/10W 0603", Device Package="0603 (1608 Metric)", manufacturer=Yageo, Operating Temperature="-55°C ~ 155°C", Power (Watts)="0.1W, 1/10W", Supplier Device Package=0603, Supplier Part Number 1=YAG2321CT-ND, Temperature Coefficient=±50ppm/°C, Tolerance=±1%, componentlink1description=Datasheet, componentlink1url=https://www.yageo.com/upload/media/product/productsearch/datasheet/rchip/PYu-RT_1-to-0.01_RoHS_L_11.pdf, componentlink2description="DigiKey Link", Composition="Thin Film", Height - Seated (Max)="0.022\" (0.55mm)", Lifecycle Status=Active, Minimum Order=1, Number of Terminations=2, Package / Case="0603 (1608 Metric)", packaging=TapeAndReel, Part Number=RT0603FRE0710KL, Part Status=Active, partid=5671, price=0.01, Resistance="10 kOhms", series=RT, Size / Dimension="0.063\" L x 0.031\" W (1.60mm x 0.80mm)", Supplier 1=DigiKey
  R200 R201 R400: componentlink2url=http://digikey.com/product-detail/en/yageo/RT0603FRE0710KL/YAG2321CT-ND/5252435, lastupdated="2022-03-07 3:35:56 PM"
  R302 R303 R305: componentlink2url=https://www.digikey.com/en/products/detail/yageo/RT0603FRE0710KL/1075040, lastupdated="2022-09-19 1:22:31 PM"
R300 R301 R311: library part PA0603-R-070RL, "RES 0 OHM JUMPER 1/10W 0603", Device Package="0603 (1608 Metric)", manufacturer=Yageo, Operating Temperature="-55°C ~ 155°C", Power (Watts)="0.1W, 1/10W", Supplier Device Package=0603, Supplier Part Number 1=YAG5757CT-ND, Temperature Coefficient=±150ppm/°C, Tolerance=Jumper, componentlink1description=Datasheet, componentlink1url=http://www.yageo.com/NewPortal/_en/search/productDocs.jsp?YageoPartNumber=PA0603-R-070RL, componentlink2description="DigiKey Link", componentlink2url=https://www.digikey.com/en/products/detail/yageo/PA0603-R-070RL/8255972, Composition="Metal Element", Features="Automotive AEC-Q200, Current Sense", Height - Seated (Max)="0.024\" (0.60mm)", lastupdated="2022-09-19 1:22:34 PM", Lifecycle Status=Active, Minimum Order=1, Number of Terminations=2, Package / Case="0603 (1608 Metric)", packaging=TapeAndReel, Part Number=PA0603-R-070RL, Part Status=Active, partid=4862, price=0.08, Resistance="0 Ohms", series=PA, Size / Dimension="0.063\" L x 0.031\" W (1.60mm x 0.80mm)", Supplier 1=DigiKey
R304: library part RC0603FR-07300KL, "RES 300K OHM 1% 1/10W 0603", Device Package="0603 (1608 Metric)", manufacturer=Yageo, Operating Temperature="-55°C ~ 155°C", Power (Watts)="0.1W, 1/10W", Supplier Device Package=0603, Supplier Part Number 1=311-300KHRCT-ND, Temperature Coefficient=±100ppm/°C, Tolerance=±1%, componentlink1description=Datasheet, componentlink1url=https://www.yageo.com/upload/media/product/productsearch/datasheet/rchip/PYu-RC_Group_51_RoHS_L_10.pdf, componentlink2description="DigiKey Link", componentlink2url=https://www.digikey.com/en/products/detail/yageo/RC0603FR-07300KL/727145, Composition="Thick Film", Features="Moisture Resistant", Height - Seated (Max)="0.022\" (0.55mm)", lastupdated="2022-09-19 1:22:24 PM", Lifecycle Status=Active, Minimum Order=1, Number of Terminations=2, Package / Case="0603 (1608 Metric)", packaging=CutTape, Part Number=RC0603FR-07300KL, Part Status=Active, partid=7517, price=0.01, Resistance="300 kOhms", series=RC_L, Size / Dimension="0.063\" L x 0.031\" W (1.60mm x 0.80mm)", Supplier 1=DigiKey
R306: library part CRCW060351K0FKEA, "RES SMD 51K OHM 1% 1/10W 0603", Device Package="0603 (1608 Metric)", manufacturer="Vishay Dale", Operating Temperature="-55°C ~ 155°C", Power (Watts)="0.1W, 1/10W", Ratings=AEC-Q200, Supplier Device Package=0603, Supplier Part Number 1=541-51.0KHCT-ND, Temperature Coefficient=±100ppm/°C, Tolerance=±1%, componentlink1description=Datasheet, componentlink1url=http://www.vishay.com/docs/20035/dcrcwe3.pdf, componentlink2description="DigiKey Link", componentlink2url=http://digikey.com/product-detail/en/vishay-dale/CRCW060351K0FKEA/541-51.0KHCT-ND/1180004, Composition="Thick Film", Features="Automotive AEC-Q200", Height - Seated (Max)="0.020\" (0.50mm)", lastupdated="2022-09-19 1:22:23 PM", Lifecycle Status=Active, Minimum Order=1, Number of Terminations=2, Package / Case="0603 (1608 Metric)", packaging=CutTape, Part Number=CRCW060351K0FKEA, Part Status=Active, partid=7831, price=0.10, Resistance="51 kOhms", series=CRCW, Size / Dimension="0.061\" L x 0.033\" W (1.55mm x 0.85mm)", Supplier 1=DigiKey
R307: library part CRGP0603F3K3, "RES 3.3K OHM 1% 1/4W 0603", Device Package="0603 (1608 Metric)", manufacturer="TE Connectivity Passive Product", Operating Temperature="-55°C ~ 155°C", Power (Watts)="0.25W, 1/4W", Supplier Device Package=0603, Supplier Part Number 1=A130422CT-ND, Temperature Coefficient=±100ppm/°C, Tolerance=±1%, componentlink1description=Datasheet, componentlink1url=https://www.te.com/commerce/DocumentDelivery/DDEController?Action=srchrtrv&DocNm=9-1773463-9&DocType=DS&DocLang=English, componentlink2description="DigiKey Link", componentlink2url=https://www.digikey.com/en/products/detail/te-connectivity-passive-product/CRGP0603F3K3/8577024, Composition="Thick Film", Features="Pulse Withstanding", Height - Seated (Max)="0.022\" (0.55mm)", lastupdated="2022-09-19 1:22:34 PM", Lifecycle Status=Active, Minimum Order=1, Number of Terminations=2, Package / Case="0603 (1608 Metric)", packaging=TapeAndReel, Part Number=CRGP0603F3K3, Part Status=Active, partid=5037, price=0.02, Resistance="3.3 kOhms", series=CRGP, Size / Dimension="0.063\" L x 0.031\" W (1.60mm x 0.80mm)", Supplier 1=DigiKey
R308: library part NCP18WB473F10RB, "THERMISTOR NTC 47KOHM 4050K 0603", B Value Tolerance=±1.5%, Device Package="0603 (1608 Metric)", manufacturer="Murata Electronics", Operating Temperature="-40°C ~ 125°C", Power - Max=100mW, Resistance Tolerance=±1%, Supplier Part Number 1=490-6942-2-ND, B25/50=4050K, B25/85=4108K, B25/100=4131K, componentlink1description=Datasheet, componentlink1url=https://www.murata.com/~/media/webrenewal/support/library/catalog/products/thermistor/ntc/r44e.ashx?la=en-us, componentlink2description="DigiKey Link", componentlink2url=http://digikey.com/product-detail/en/murata-electronics/NCP18WB473F10RB/490-6942-2-ND/2595099, lastupdated="2022-09-19 1:53:39 PM", Lifecycle Status=Active, Minimum Order=0, Mounting Type="Surface Mount", Package / Case="0603 (1608 Metric)", packaging=TapeAndReel, Part Number=NCP18WB473F10RB, Part Status=Active, partid=378, price=0.20, Resistance in Ohms @ 25°C=47k, series=NCP18, Supplier 1=DigiKey
R309 R310: library part RT0603FRE071KL, "RES SMD 1K OHM 1% 1/10W 0603", Device Package="0603 (1608 Metric)", manufacturer=Yageo, Operating Temperature="-55°C ~ 155°C", Power (Watts)="0.1W, 1/10W", Supplier Device Package=0603, Supplier Part Number 1=YAG2323CT-ND, Temperature Coefficient=±50ppm/°C, Tolerance=±1%, componentlink1description=Datasheet, componentlink1url=https://www.yageo.com/upload/media/product/productsearch/datasheet/rchip/PYu-RT_1-to-0.01_RoHS_L_11.pdf, componentlink2description="DigiKey Link", componentlink2url=https://www.digikey.com/en/products/detail/yageo/RT0603FRE071KL/1075188, Composition="Thin Film", Height - Seated (Max)="0.022\" (0.55mm)", lastupdated="2022-09-14 8:09:45 AM", Lifecycle Status=Active, Minimum Order=1, Number of Terminations=2, Package / Case="0603 (1608 Metric)", packaging=TapeAndReel, Part Number=RT0603FRE071KL, Part Status=Active, partid=5672, price=0.01, Resistance="1 kOhms", series=RT, Size / Dimension="0.063\" L x 0.031\" W (1.60mm x 0.80mm)", Supplier 1=DigiKey
R401: library part RC0603FR-0717K4L, "RES 17.4K OHM 1% 1/10W 0603", Device Package="0603 (1608 Metric)", manufacturer=Yageo, Operating Temperature="-55°C ~ 155°C", Power (Watts)="0.1W, 1/10W", Supplier Device Package=0603, Supplier Part Number 1=311-17.4KHRCT-ND, Temperature Coefficient=±100ppm/°C, Tolerance=±1%, componentlink1description=Datasheet, componentlink1url=https://www.yageo.com/upload/media/product/productsearch/datasheet/rchip/PYu-RC_Group_51_RoHS_L_10.pdf, componentlink2description="DigiKey Link", componentlink2url=https://www.digikey.com/en/products/detail/yageo/RC0603FR-0717K4L/726981, Composition="Thick Film", Features="Moisture Resistant", Height - Seated (Max)="0.022\" (0.55mm)", lastupdated="2022-09-19 1:22:24 PM", Lifecycle Status=Active, Minimum Order=1, Number of Terminations=2, Package / Case="0603 (1608 Metric)", packaging=CutTape, Part Number=RC0603FR-0717K4L, Part Status=Active, partid=7526, price=0.01, Resistance="17.4 kOhms", series=RC_L, Size / Dimension="0.063\" L x 0.031\" W (1.60mm x 0.80mm)", Supplier 1=DigiKey
R402 R403: library part RT0603FRE0733KL, "RES SMD 33K OHM 1% 1/10W 0603", Device Package="0603 (1608 Metric)", manufacturer=Yageo, Operating Temperature="-55°C ~ 155°C", Power (Watts)="0.1W, 1/10W", Supplier Device Package=0603, Supplier Part Number 1=YAG5959CT-ND, Temperature Coefficient=±50ppm/°C, Tolerance=±1%, componentlink1description=Datasheet, componentlink1url=https://www.yageo.com/upload/media/product/productsearch/datasheet/rchip/PYu-RT_1-to-0.01_RoHS_L_11.pdf, componentlink2description="DigiKey Link", componentlink2url=https://www.digikey.com/en/products/detail/yageo/RT0603FRE0733KL/1075313, Composition="Thin Film", Height - Seated (Max)="0.022\" (0.55mm)", lastupdated="2022-09-19 1:22:31 PM", Lifecycle Status=Active, Minimum Order=1, Number of Terminations=2, Package / Case="0603 (1608 Metric)", packaging=TapeAndReel, Part Number=RT0603FRE0733KL, Part Status=Active, partid=5680, price=0.01, Resistance="33 kOhms", series=RT, Size / Dimension="0.063\" L x 0.031\" W (1.60mm x 0.80mm)", Supplier 1=DigiKey
S200 S201: "SWITCH TACTILE SPST-NO 0.05A 24V", Contact Rating @ Voltage="0.05A @ 24VDC", manufacturer="TE Connectivity ALCOSWITCH Switches", Operating Force=160gf, Supplier Part Number 1=1977223-9-ND, Actuator Height off PCB, Vertical=5.00mm, Actuator Orientation="Top Actuated", Actuator Type=Standard, Circuit=SPST-NO, componentlink1description=Datasheet, componentlink1url=https://www.te.com/commerce/DocumentDelivery/DDEController?Action=srchrtrv&DocNm=1308111-1_SWITCHES_CORE_PROGRAM_CATALOG&DocType=CS&DocLang=English, componentlink2description="DigiKey Link", componentlink2url=http://digikey.com/product-detail/en/te-connectivity-alcoswitch-switches/1977223-9/1977223-9-ND/5597033, Illumination=Non-Illuminated, lastupdated="2020-08-30 9:06:45 PM", Lifecycle Status=Active, Minimum Order=30000, Mounting Type="Surface Mount", Outline="6.00mm x 6.00mm", packaging=Bulk, Part Number=1977223-9, price=0.16, series=FSMJSMA, Supplier 1=DigiKey, Switch Function=Off-Mom, Termination Style="Gull Wing"
S300 S301: library part CMP-00054-3, "12mm x 18.5mm Rocker Switch 6A 250VAC"
TP200 TP303 TP304 TP305 TP306 TP400 TP401 TP402 TP403 TP404 TP405 TP406: library part CMP-002-00006-1, "1.5mm Test Point 0.75mm hole size"
TP300 TP301 TP302: library part CMP-00053-4, "Conn Test Point 1 POS Solder ST SMD 1 Port T/R", Color=Natural, Body Material=Brass, Material="Copper Alloy", Mount="Surface Mount", packaging="Cut Tape", Plating=Tin, series="S2751, EZ BoardWare"
U200: library part CMP-00055-1, "Raspberry Pi Pico W"
U300: library part CMP-0321-00476-2, "1 A, Single-Input, Single Cell Li-Ion Battery Charger with 50 mA LDO, -40 to 85 degC, 10-pin WSON (DQC), Green (RoHS & no Sb/Br)", manufacturer="Texas Instruments", Over Voltage Protection=N, componentlink1description=Datasheet, componentlink1url=http://www.ti.com/general/docs/lit/getliterature.tsp?genericPartNumber=BQ25050&fileType=pdf, DatasheetVersion=SLUSA33, Eco-Plan="Green (RoHS & no Sb/Br)", Lead Acid=N, Li-Ion=N, Li-Polymer=N, Mounting Technology="Surface Mount", NiCd=N, NiMH=N, PackageDescription="10-Pin Plastic Small Outline No-Lead, 2 x 3 x 0.8 mm Body, 0.5 mm Pitch, Exposed Pad", PackageReference=DQC0010A, PackageVersion="revA, Jul-2008", PartNumber=BQ25050DQCR, SubFamily="Battery Charge Management"
U301: library part CMP-04918-000409-1, "IC REG BCK BST ADJ 3.6A 15VQFN", Case/Package=VQFN, Max Input Voltage=16V, Max Operating Temperature=125°C, Max Output Voltage=9V, Min Input Voltage=2V, Min Operating Temperature=-40°C, Min Output Voltage=2.5V, Output Current=2A, Quiescent Current=50uA, Switching Frequency=2.4MHz, Lead Free="Lead Free", Mount="Surface Mount", Number of Outputs=1, Number of Pins=15, Output Configuration=Positive, Output Type=Adjustable, packaging="Tape and Reel", RoHS Compliant=Yes, Synchronous Rectifier=Yes, Topology=Buck-Boost

## Via types
v1: diameter 1, hole 0.5, Top Layer 1 to Bottom Layer 1, tented both sides, 44 vias
v2: diameter 3.1, hole 3.1, Top Layer 1 to Bottom Layer 1, tented both sides, 4 vias
v3: diameter 0.5, hole 0.2, Top Layer 1 to Bottom Layer 1, 2 vias